# Altium PCB boardLedSeq.PcbDoc
Units mm, origin at the board's own origin, x right, y up, seen from the top; angles counter-clockwise.
Board outline 27 x 41 mm, 2 copper layers (Top Layer, Bottom Layer), stack 1.67 mm thick; 31 components, 26 nets, 83 pads, 33 vias.
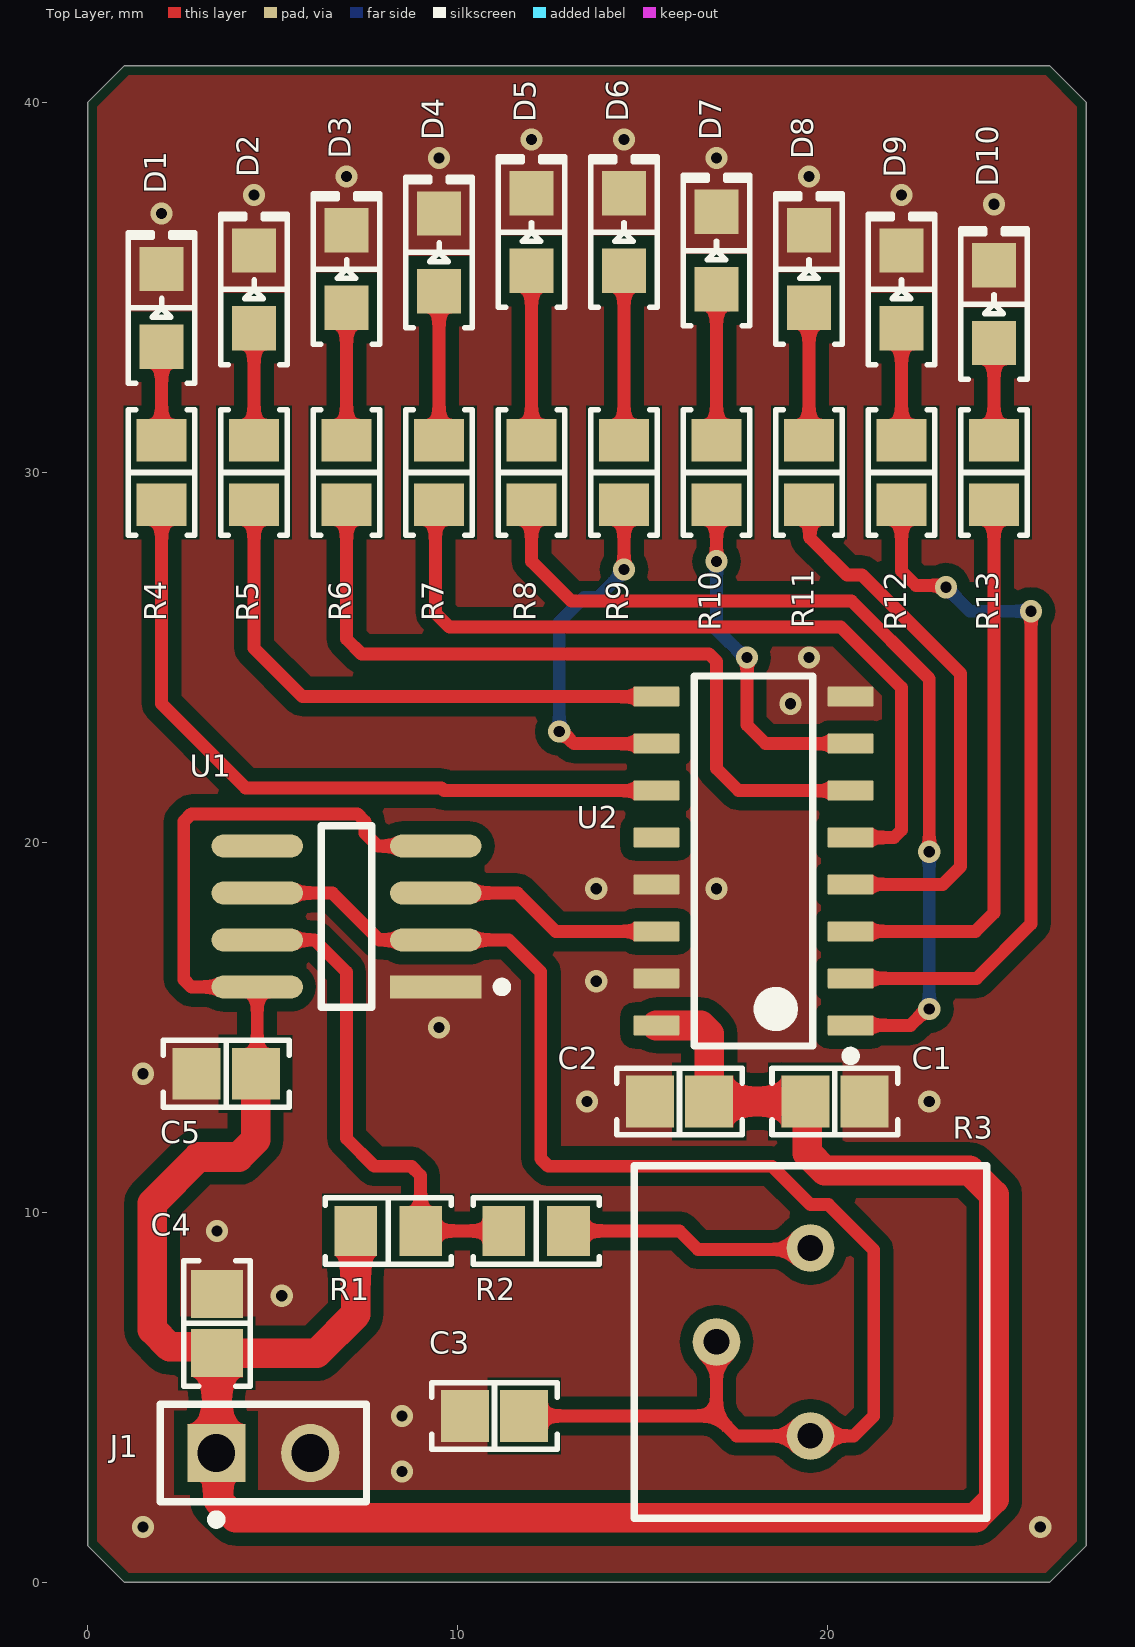
[diagram p0: Top Layer view]
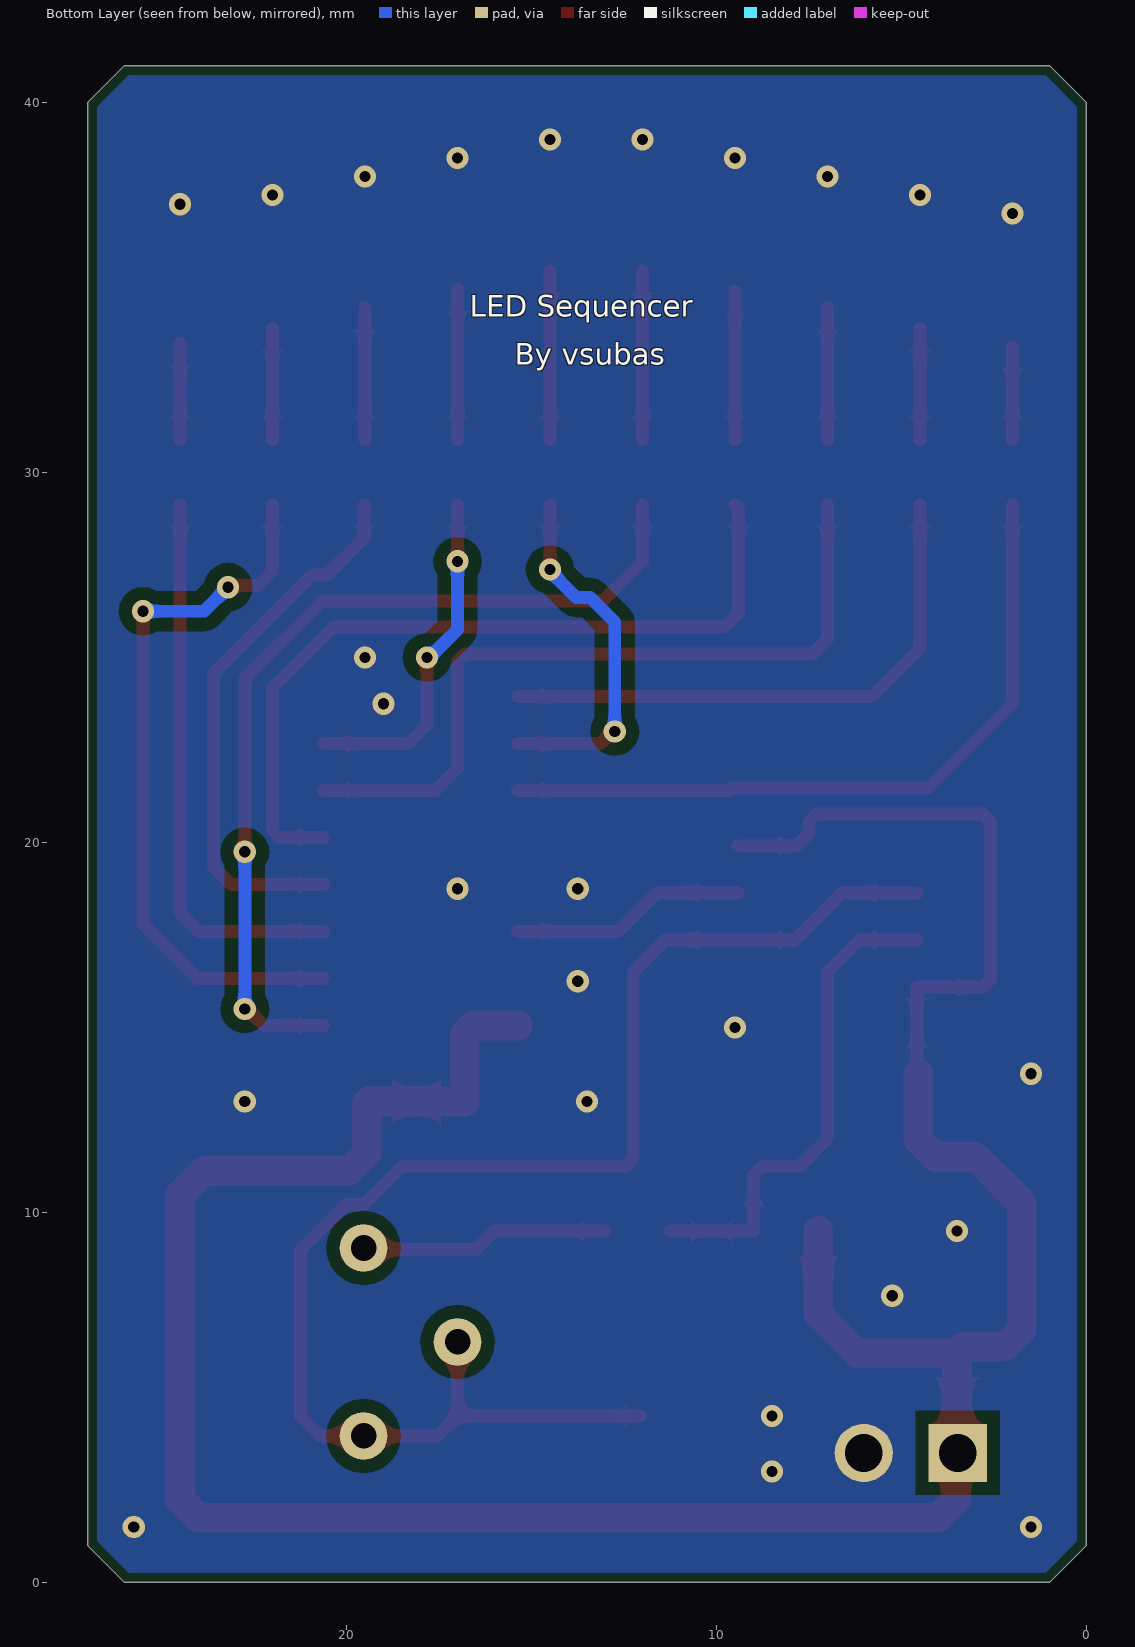
[diagram p1: Bottom Layer view, seen from below]
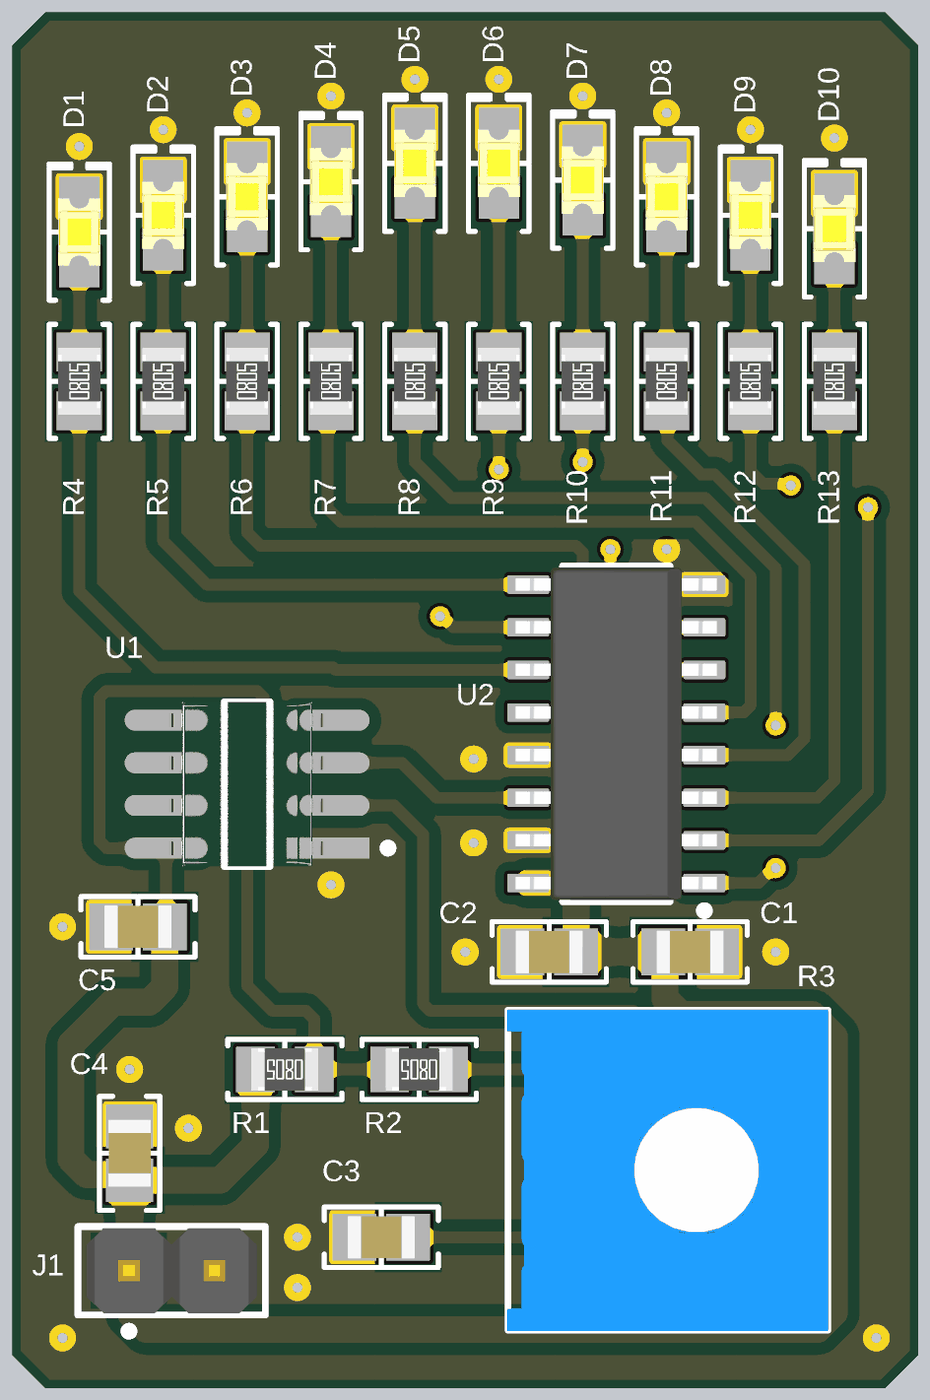
[diagram p2: 3D render of the assembled board from above, using the file's embedded part models]

## Layer stack, top to bottom
Top Solder: solder mask 0.0254, SM-001, Dk 4
Top Layer: signal copper 0.035
Dielectric 1: core 1.6, Core-043, Dk 4.3
Bottom Layer: signal copper 0.035
Bottom Solder: solder mask 0.0254, SM-001, Dk 4

## Board outline
1,0 0,1 0,40 1,41 26,41 27,40 27,1 26,0

## Design rules (kind name [scope] priority, off if disabled: settings)
BoardOutlineClearance [All] p1: gap=0.254 ignorepadtopadclearanceinfootprint=FALSE
Clearance [All] p1: gap=0.35 ignorepadtopadclearanceinfootprint=TRUE
MinimumSolderMaskSliver [All] p1: minsoldermaskwidth=0.05
PlaneClearance [All] p1: clearance=0.35
PlaneConnect [All] p1: pad.planeconnectstyle=Relief pad.reliefexpansion=0.508 pad.reliefentries=4 pad.reliefconductorwidth=0.5 pad.reliefairgap=0.254 via.planeconnectstyle=Direct via.reliefexpansion=0.508 via.reliefentries=4 via.reliefconductorwidth=0.254 via.reliefairgap=0.254
PolygonConnect [All] p1: connectstyle=Direct reliefconductorwidth=0.5 reliefentries=4 polygonreliefangle="45 Angle" airgapwidth=0.254
RoutingVias [All] p1: holewidth=0.3 width=0.6 viastyle="Through Hole" minholewidth=0.3 minwidth=0.6 maxholewidth=0.3 maxwidth=0.6
SilkToSilkClearance [All] p1: silktosilkclearance=0.05
SilkToSolderMaskClearance [IsPad] p1: minsilkscreentomaskgap=0.05 clearancetoexposedcopper=TRUE
SolderMaskExpansion [All] p1: expansion=0.102 istentingtop=FALSE
Width [All] p1: maxlimit=0.8 minlimit=0.254 preferedwidth=0.35
25 further rules are at their usual default settings.

## Components (designator, comment, footprint, x,y, rotation, side; value= is the part's Value field where it differs from the comment)
C1 "10 µF" "CAP 0805_2012" 20.2,13 r180 top
C2 "0.1 µF" "CAP 0805_2012" 16,13 r0 top
C3 "1µF" "CAP 0805_2012" 11,4.5 r0 top
C4 "10 µF" "CAP 0805_2012" 3.5,7 r270 top
C5 "0.1 µF" "CAP 0805_2012" 3.75,13.75 r0 top
D1 "Yellow" "LED 0805_2012 YELLOW" 2,34.45 r90 top
D2 "Yellow" "LED 0805_2012 YELLOW" 4.5,34.95 r90 top
D3 "Yellow" "LED 0805_2012 YELLOW" 7,35.5 r90 top
D4 "Yellow" "LED 0805_2012 YELLOW" 9.5,35.95 r90 top
D5 "Yellow" "LED 0805_2012 YELLOW" 12,36.5 r90 top
D6 "Yellow" "LED 0805_2012 YELLOW" 14.5,36.5 r90 top
D7 "Yellow" "LED 0805_2012 YELLOW" 17,36 r90 top
D8 "Yellow" "LED 0805_2012 YELLOW" 19.5,35.5 r90 top
D9 "Yellow" "LED 0805_2012 YELLOW" 22,34.95 r90 top
D10 "Yellow" "LED 0805_2012 YELLOW" 24.5,34.55 r90 top
J1 "M20-9990245" FP-M20-9990245-MFG 4.75,3.5 r0 top
R1 "2.2k" "RES 0805_2012" 8.125,9.5 r180 top
R2 "10k" "RES 0805_2012" 12.125,9.5 r180 top
R3 "50k" "BOURNS TRIMPOT 3386P-1" 19.54,6.5 r270 top
R4 "1k" "RES 0805_2012" 2,30 r90 top
R5 "1k" "RES 0805_2012" 4.5,30 r90 top
R6 "1k" "RES 0805_2012" 7,30 r90 top
R7 "1k" "RES 0805_2012" 9.5,30 r90 top
R8 "1k" "RES 0805_2012" 12,30 r90 top
R9 "1k" "RES 0805_2012" 14.5,30 r90 top
R10 "1k" "RES 0805_2012" 17,30 r90 top
R11 "1k" "RES 0805_2012" 19.5,30 r90 top
R12 "1k" "RES 0805_2012" 22,30 r90 top
R13 "1k" "RES 0805_2012" 24.5,30 r90 top
U1 "NE555DR" FP-D0008A-IPC_A 7,18 r180 top
U2 "CD4017BM96" D0016A_L 18,19.5 r180 top

## Footprints (in the part's own frame and the unit in brackets; to place one, negate y for a bottom-side part, rotate by r counter-clockwise, add the part's x,y. Pads: shape width x height; smd on the part's side, far side on the other; paste and mask are expansions set on the pad)
"BOURNS TRIMPOT 3386P-1" [mm] "3386 - 3/8 ? Square Trimpot® Trimming Potentiometer"
  round 1.29 hole 0.69: 1(-2.54,0) 2(0,-2.54) 3(2.54,0)
  silkscreen extent -4.76,-4.76 4.76,4.76, body extent -4.79,-4.79 4.79,4.79, height 4.95
"CAP 0805_2012" [mm] "Chip Capacitor, 2-Leads, Body 2.00x1.20mm, IPC Medium Density"
  rect 1.3x1.4 smd: 1(-0.8,0) 2(0.8,0)
  silkscreen extent -1.7,-0.9 1.7,0.9, body extent -1,-0.64 1,0.64, height 1.26
D0016A_L [mm] "SOIC, 16-Leads, Body 10x4mm, Pitch 1.27mm, IPC High Density"
  rrect18% 1.25x0.55 smd: 1(-2.625,4.445) 2(-2.625,3.175) 3(-2.625,1.905) 4(-2.625,0.635) 5(-2.625,-0.635) 6(-2.625,-1.905) 7(-2.625,-3.175) 8(-2.625,-4.445) 9(2.625,-4.445) 10(2.625,-3.175) 11(2.625,-1.905) 12(2.625,-0.635) 13(2.625,0.635) 14(2.625,1.905) 15(2.625,3.175) 16(2.625,4.445)
  silkscreen extent -2.75,-5 1.6,5.39, body extent -3,-4.95 3,4.95, height 1.59
FP-D0008A-IPC_A [mm]
  rect 2.469x0.622 smd paste+0 mask+0: 1(-2.414,1.905)
  rrect100% 2.469x0.622 smd paste+0 mask+0: 2(-2.414,0.635) 3(-2.414,-0.635) 4(-2.414,-1.905) 5(2.414,-1.905) 6(2.414,-0.635) 7(2.414,0.635) 8(2.414,1.905)
  silkscreen extent -4.32,-2.45 0.68,2.45, body extent -4.15,-2.95 4.15,2.95, height 0.25
FP-M20-9990245-MFG [mm]
  rect 1.57x1.57 hole 1.02 paste-1000 mask+0: 1(-1.27,0)
  round 1.57 hole 1.02 paste-1000 mask+0: 2(1.27,0)
  silkscreen extent -2.79,-1.92 2.79,1.32, body extent -2.89,-1.42 2.89,1.42, height 0.25
"LED 0805_2012 YELLOW" [mm] "Chip Diode, 2-Leads, Body 2.00x1.25mm, IPC Medium Density"
  rect 1.2x1.2 smd: 1(-1.05,0) 2(1.05,0)
  silkscreen extent -2.03,-0.9 2.03,0.9, body extent -1,-0.62 1,0.63, height 0.9
"RES 0805_2012" [mm] "Chip Resistor, 2-Leads, Body 2.00x1.25mm, IPC Medium Density"
  rect 1.15x1.35 smd: 1(-0.875,0) 2(0.875,0)
  silkscreen extent -1.7,-0.9 1.7,0.9, body extent -1,-0.62 1,0.63, height 0.6

## Part data
C1 C4: library part C2012X5R1E106K125AB, "CAP CER 10UF 25V X5R 0805", Device Package="0805 (2012 Metric)", manufacturer="TDK Corporation", Operating Temperature="-55°C ~ 85°C", Supplier Part Number 1=445-5984-1-ND, Temperature Coefficient=X5R, Tolerance=±10%, Voltage - Rated=25V, Applications="General Purpose", Capacitance="10 µF", componentlink1description=Datasheet, componentlink1url=https://product.tdk.com/info/en/catalog/datasheets/mlcc_commercial_general_en.pdf?ref_disty=digikey, componentlink2description="DigiKey Link", componentlink2url=https://www.digikey.com/en/products/detail/tdk-corporation/C2012X5R1E106K125AB/2443462, Features="Low ESL", lastupdated="29/04/2023 7:14:18 PM", Lifecycle Status=Active, Minimum Order=1, Mounting Type="Surface Mount, MLCC", Package / Case="0805 (2012 Metric)", packaging=TapeAndReel, Part Number=C2012X5R1E106K125AB, Part Status=Active, partid=4850, price=0.06, series=C, Size / Dimension="0.079\" L x 0.049\" W (2.00mm x 1.25mm)", Supplier 1=DigiKey, Thickness (Max)="0.057\" (1.45mm)"
C2 C5: library part CC0805MRX7R9BB104, "CAP CER 0.1UF 50V X7R 0805", Device Package="0805 (2012 Metric)", manufacturer=Yageo, Operating Temperature="-55°C ~ 125°C", Supplier Part Number 1=311-4351-1-ND, Temperature Coefficient=X7R, Tolerance=±20%, Voltage - Rated=50V, Applications="General Purpose", Capacitance="0.1 µF", componentlink1description=Datasheet, componentlink1url=https://www.yageo.com/upload/media/product/productsearch/datasheet/mlcc/UPY-GPHC_X7R_6.3V-to-50V_18.pdf, componentlink2description="DigiKey Link", componentlink2url=https://www.digikey.com/en/products/detail/yageo/CC0805MRX7R9BB104/5884281, lastupdated="29/04/2023 7:14:25 PM", Lifecycle Status=Active, Minimum Order=1, Mounting Type="Surface Mount, MLCC", Package / Case="0805 (2012 Metric)", packaging=TapeAndReel, Part Number=CC0805MRX7R9BB104, Part Status=Active, partid=2475, price=0.01, series=CC, Size / Dimension="0.079\" L x 0.049\" W (2.00mm x 1.25mm)", Supplier 1=DigiKey, Thickness (Max)="0.037\" (0.95mm)"
C3: library part MM05ZC105KCZ2A, "CAP CER 1UF 10V X7R 0805", Device Package="0805 (2012 Metric)", manufacturer="AVX Corporation", Operating Temperature="-55°C ~ 125°C", Supplier Part Number 1=478-10611-1-ND, Temperature Coefficient=X7R, Tolerance=±10%, Voltage - Rated=10V, Applications="Medical, Non-Critical", Capacitance=1µF, componentlink1description=Datasheet, componentlink1url=http://datasheets.avx.com/AVX-MM.pdf, componentlink2description="DigiKey Link", componentlink2url=http://digikey.com/product-detail/en/avx-corporation/MM05ZC105KCZ2A/478-10611-1-ND/7344872, lastupdated="2/09/2020 1:04:42 AM", Lifecycle Status=Active, Minimum Order=1, Mounting Type="Surface Mount, MLCC", Package / Case="0805 (2012 Metric)", packaging=TapeAndReel, Part Number=MM05ZC105KCZ2A, Part Status=Active, partid=2439, price=0.50, series=MM, Size / Dimension="0.079\" L x 0.049\" W (2.01mm x 1.25mm)", Supplier 1=DigiKey, Thickness (Max)="0.029\" (0.74mm)"
D1 D2 D3 D4 D5 D6 D7 D8 D9 D10: library part 5988140107F, "LED YELLOW CLEAR 0805 SMD", Current - Test=20mA, Device Package="0805 (2012 Metric)", Lens Color=Colorless, manufacturer=Dialight, Millicandela Rating=130mcd, Supplier Device Package=0805, Supplier Part Number 1=350-2041-1-ND, Voltage - Forward (Vf) (Typ)=2V, Color=Yellow, componentlink1description=Datasheet, componentlink1url=//media.digikey.com/pdf/Data%20Sheets/Dialight%20PDFs/598_Series_0805_Pkg.pdf, componentlink2description="DigiKey Link", componentlink2url=https://www.digikey.com/en/products/detail/dialight/5988140107F/1291275, Configuration=Standard, Height (Max)=0.80mm, lastupdated="29/04/2023 8:08:57 PM", Lens Size="1.40mm x 1.25mm", Lens Style="Rectangle with Flat Top", Lens Transparency=Clear, Lifecycle Status=Active, Minimum Order=1, Mounting Type="Surface Mount", Package / Case="0805 (2012 Metric)", packaging=TapeAndReel, Part Number=5988140107F, Part Status=Active, partid=48, price=0.05, series=598, Size / Dimension="2.00mm L x 1.25mm W", Supplier 1=DigiKey, Viewing Angle=140°, Wavelength - Dominant=593nm
J1: library part CMP-15831-000105-1, "CONN HEADER VERT 2POS 2.54MM", Case/Package=SIL, Color=Black, Contact Resistance=25mR, Current=3A, Flammability Rating="UL94 V-0", Insulation Resistance=10GR, Max Operating Temperature=105°C, Min Operating Temperature=-40°C, Package Quantity=1000, Voltage=50V, Voltage Rating (AC)=750V, Connector Type="Male Pin", Contact Finish - Mating=GOLD, Contact Material=Brass, Contact Mating Length=0.24inch, Contact Plating=Gold, Contact Shape=Square, Contact Type="Male Pin", Current Rating=3A, Depth=2.54mm, Fastening Type=Pull, Gender=Male, Height=0.12inch, Housing Color=Black, Housing Material=Nylon, Insulation Color=Black, Insulation Material=Nylon, Lead Pitch=2.54mm, Length=5.08mm, Mated Stacking Heights=16.54mm, Mating Cycles=300, Max Current Rating=3A, Mount="Through Hole", Number of Contacts=2, Number of Poles=2, Number of Positions=2, Number of Rows=1, Orientation=Straight, packaging=Bulk, Pitch=2.54mm, Radiation Hardening=No, Reach SVHC Compliant=Yes, series=M20, Termination=Solder, Weight=0.25lb, Width=0.25inch, Working Voltage=750V
R1: library part SR0805JR-7W2K2L, "RES 2.2K OHM 5% 1/4W 0805", Device Package="0805 (2012 Metric)", manufacturer=Yageo, Operating Temperature="-55°C ~ 155°C", Power (Watts)="0.25W, 1/4W", Ratings=AEC-Q200, Supplier Device Package=0805, Supplier Part Number 1=YAG6054CT-ND, Temperature Coefficient=±100ppm/°C, Tolerance=±5%, componentlink1description=Datasheet, componentlink1url=http://www.yageo.com/documents/recent/PYu-SR_20105_RoHS_L_8.pdf, componentlink2description="DigiKey Link", componentlink2url=https://www.digikey.com/en/products/detail/yageo/SR0805JR-7W2K2L/5948720, Composition="Thick Film", Features="Automotive AEC-Q200, Pulse Withstanding", Height - Seated (Max)="0.024\" (0.60mm)", lastupdated="29/04/2023 7:52:18 PM", Lifecycle Status=Active, Minimum Order=1, Number of Terminations=2, Package / Case="0805 (2012 Metric)", packaging=TapeAndReel, Part Number=SR0805JR-7W2K2L, Part Status=Active, partid=27793, price=0.02, Resistance=2.2k, series=SR, Size / Dimension="0.079\" L x 0.049\" W (2.00mm x 1.25mm)", Supplier 1=DigiKey
R2: library part RNCS0805BKE10K0, "RES 10K OHM 0.1% 1/10W 0805", Device Package="0805 (2012 Metric)", manufacturer="Stackpole Electronics Inc", Operating Temperature="-55°C ~ 155°C", Power (Watts)="0.1W, 1/10W", Ratings=AEC-Q200, Supplier Device Package=0805, Supplier Part Number 1=RNCS0805BKE10K0CT-ND, Temperature Coefficient=±25ppm/°C, Tolerance=±0.1%, componentlink1description=Datasheet, componentlink1url=https://www.seielect.com/catalog/sei-rncs_rnch.pdf, componentlink2description="DigiKey Link", componentlink2url=https://www.digikey.com/en/products/detail/stackpole-electronics-inc/RNCS0805BKE10K0/1800067, Composition="Thin Film", Features="Anti-Corrosive, Automotive AEC-Q200, Moisture Resistant", Height - Seated (Max)="0.026\" (0.65mm)", lastupdated="29/04/2023 7:52:18 PM", Lifecycle Status=Active, Minimum Order=1, Number of Terminations=2, Package / Case="0805 (2012 Metric)", packaging=TapeAndReel, Part Number=RNCS0805BKE10K0, Part Status=Active, partid=27713, price=0.07, Resistance=10k, series=RNCS, Size / Dimension="0.079\" L x 0.049\" W (2.00mm x 1.25mm)", Supplier 1=DigiKey
R3: library part 3386P-1-503, "TRIMMER 50K OHM 0.5W PC PIN TOP", manufacturer="Bourns Inc.", Power (Watts)="0.5W, 1/2W", Resistive Material=Cermet, Supplier Part Number 1=3386P-503-ND, Temperature Coefficient=±100ppm/°C, Tolerance=±10%, Adjustment Type="Top Adjustment", componentlink1description=Datasheet, componentlink1url=https://www.bourns.com/docs/Product-Datasheets/3386.pdf, componentlink2description="DigiKey Link", componentlink2url=https://www.digikey.com/en/products/detail/bourns-inc/3386P-1-503/86812, lastupdated="29/04/2023 8:27:50 PM", Lifecycle Status=Active, Minimum Order=1, Mounting Type="Through Hole", Number of Turns=1, packaging=Tube, Part Number=3386P-1-503, Part Status=Active, partid=123, price=1.18, Resistance=50k, series="Trimpot® 3386 - Sealed", Size / Dimension="Square - 0.375\" x 0.375\" Face (9.53mm x 9.53mm)", Supplier 1=DigiKey, Termination Style="PC Pins"
R4 R5 R6 R7 R8 R9 R10 R11 R12 R13: library part RNCS0805BKE1K00, "RES 1K OHM 0.1% 1/10W 0805", Device Package="0805 (2012 Metric)", manufacturer="Stackpole Electronics Inc", Operating Temperature="-55°C ~ 155°C", Power (Watts)="0.1W, 1/10W", Ratings=AEC-Q200, Supplier Device Package=0805, Supplier Part Number 1=RNCS0805BKE1K00CT-ND, Temperature Coefficient=±25ppm/°C, Tolerance=±0.1%, componentlink1description=Datasheet, componentlink1url=https://www.seielect.com/catalog/sei-rncs_rnch.pdf, componentlink2description="DigiKey Link", componentlink2url=https://www.digikey.com/en/products/detail/stackpole-electronics-inc/RNCS0805BKE1K00/1800073, Composition="Thin Film", Features="Anti-Corrosive, Automotive AEC-Q200, Moisture Resistant", Height - Seated (Max)="0.026\" (0.65mm)", lastupdated="29/04/2023 7:52:18 PM", Lifecycle Status=Active, Minimum Order=1, Number of Terminations=2, Package / Case="0805 (2012 Metric)", packaging=TapeAndReel, Part Number=RNCS0805BKE1K00, Part Status=Active, partid=27715, price=0.07, Resistance=1k, series=RNCS, Size / Dimension="0.079\" L x 0.049\" W (2.00mm x 1.25mm)", Supplier 1=DigiKey
U1: library part CMP-1685-00007-2, "IC OSC SGL TIMER 100KHZ 8-SOIC", Case/Package=SOIC, Frequency=100kHz, High Level Output Current=-200mA, Low Level Output Current=200mA, Max Operating Temperature=70°C, Max Supply Voltage=16V, Min Operating Temperature=0°C, Min Supply Voltage=4.5V, Operating Supply Current=10mA, Package Quantity=2500, Quiescent Current=15mA, Contact Plating=Gold, Height=1.58mm, Lead Free="Lead Free", Length=4.9mm, Mount="Surface Mount", Number of Pins=8, Number of Timers/Counters=1, packaging="Tape and Reel", Radiation Hardening=No, REACH SVHC="No SVHC", Weight=0.002561oz, Width=3.91mm
U2: library part CMP-1623-00072-2, "CMOS Decade Counter with 10 Decoded Outputs, D0016A, LARGE T&R", F @ Nom Voltage(Max)(Mhz)=8, Generic Part Number=CD4017B, ICC @ Nom Voltage(Max)(mA)=0.03, manufacturer="Texas Instruments", Operating Temperature Range(C)="-55 to 125", Rating=Military, tpd @ Nom Voltage(Max)(ns)=270, Voltage(Nom)(V)=10, Bits(#)=10, Code_JEDEC="MS-012 variation AC", DatasheetVersion=SCHS027C, Function=Counter, Input Type=CMOS, Inputs=1, Output Drive (IOL/IOH)(Max)(mA)=1.5/-1.5, Output Type=CMOS, PackageReference=D0016A, Schmitt Trigger=No, Technology Family=CD4000, Type=Decade, VCC(Max)(V)=18, VCC(Min)(V)=3

## Via types
v1: diameter 0.6, hole 0.3, Top Layer to Bottom Layer, 33 vias

## Nets (pads, with @x,y where several pads share a name; then routed paths per layer and width w, separated by ;. In a path a pad name is that pad's centre, name@x,y a point inside that pad or via, vN(x,y) a via of type N, cw(c..) or ccw(c..) an arc to the next point about the centre after c; other vN are vias at no path point)
+5V: C1.2 C2.2 C4.2 C5.2 J1.1 R1.2 U1.4 U1.8 U2.16 | length 79.8
  Top Layer w0.35: C5.2 4.586,13.786 U1.8 2.805,16.095 2.6,16.3 2.6,20.57 2.805,20.775 7.295,20.775 7.5,20.57 7.5,20.25 7.845,19.905 U1.4
  Top Layer w0.8: C5.2 4.55,11.969 4.081,11.5 3,11.5 1.75,10.25 1.75,6.834 2.219,6.366 3.334,6.366 C4.2 ; R1.2 7.25,7.25 6.2,6.2 C4.2 ; U2.16 16.577,15.055 16.8,14.832 C2.2 C1.2 19.453,12.947 19.453,11.606 19.923,11.135 23.839,11.135 24.5,10.474 24.5,2.25 24,1.75 4,1.75 3.531,2.219 3.531,2.969 3.5,3 C4.2
CLK: U1.3 U2.14 | length 6.4
  Top Layer w0.35: U1.3 11.615,18.635 12.655,17.595 U2.14
DISCH: R1.1 R2.2 U1.7 | length 13.4
  Top Layer w0.35: U1.7 6.135,17.365 7,16.5 7,12 7.75,11.25 8.75,11.25 9,11 R1.1 R2.2
GND: C1.1 C2.1 C3.1 C4.1 C5.1 D1.2 D2.2 D3.2 D4.2 D5.2 D6.2 D7.2 D8.2 D9.2 D10.2 J1.2 U1.1 U2.8 U2.13 U2.15
  other v1: 1.5,1.5 25.75,1.5 8.5,3 8.5,4.5 5.25,7.75 3.5,9.5 13.5,13 22.75,13 1.5,13.75 9.5,15 13.75,16.25 13.75,18.75 17,18.75 19,23.75 19.5,25 2,37 24.5,37.25 4.5,37.5 22,37.5 7,38 19.5,38 9.5,38.5 17,38.5 12,39 14.5,39
OUTD0: R13.1 U2.3 | length 15.1
  Top Layer w0.35: U2.3 23.995,17.595 24.5,18.1 R13.1
OUTD1: R12.1 U2.2 | length 19.7
  Top Layer w0.35: U2.2 24.025,16.325 25.5,17.8 v1(25.5,26.25) ; R12.1 22,27.339 22.391,26.948 23.152,26.948 v1(23.2,26.9)
  Bottom Layer w0.35: v1(23.2,26.9) 23.85,26.25 v1(25.5,26.25)
OUTD2: R11.1 U2.4 | length 14.9
  Top Layer w0.35: R11.1 19.526,29.099 19.526,28.23 20.531,27.225 20.938,27.225 23.6,24.563 23.6,19.35 23.115,18.865 U2.4
OUTD3: R10.1 U2.7 | length 9.3
  Top Layer w0.35: v1(17,27.6) R10.1 ; v1(17.825,25) 17.825,23.175 18.325,22.675 U2.7
  Bottom Layer w0.35: v1(17,27.6) 17,25.75 17.328,25.422 17.335,25.422 17.757,25 v1(17.825,25)
OUTD4: R9.1 U2.10 | length 9.8
  Top Layer w0.35: v1(12.75,23) 12.818,23 13.143,22.675 U2.10 ; v1(14.5,27.375) R9.1
  Bottom Layer w0.35: v1(12.75,23) 12.75,25.958 13.414,26.622 13.789,26.622 14.5,27.333 v1(14.5,27.375)
OUTD5: R8.1 U2.1 | length 24.8
  Top Layer w0.35: R8.1 12,27.6 13.075,26.525 20.648,26.525 22.75,24.423 v1(22.75,19.75) ; U2.1 22.237,15.055 22.682,15.5 v1(22.75,15.5)
  Bottom Layer w0.35: v1(22.75,15.5) v1(22.75,19.75)
OUTD6: R7.1 U2.5 | length 21.7
  Top Layer w0.35: R7.1 9.4,29.025 9.4,26.205 9.78,25.825 20.358,25.825 22,24.183 22,20.34 21.795,20.135 U2.5
OUTD7: R6.1 U2.6 | length 20.6
  Top Layer w0.35: R6.1 7,25.5 7.4,25.1 16.795,25.1 17,24.895 17,22 17.595,21.405 U2.6
OUTD8: R5.1 U2.9 | length 15.3
  Top Layer w0.35: R5.1 4.5,25.25 5.805,23.945 U2.9
OUTD9: R4.1 U2.11 | length 19.7
  Top Layer w0.35: R4.1 2,23.75 4.275,21.475 9.565,21.475 9.635,21.405 U2.11
R2R3: R2.1 R3.1 | length 6.8
  Top Layer w0.35: R2.1 16,9.5 16.5,9 19.5,9 R3.1
RD1: D1.1 R4.2 | length 2.5
  Top Layer w0.35: R4.2 D1.1
RD2: D2.1 R5.2 | length 3
  Top Layer w0.35: R5.2 D2.1
RD3: D3.1 R6.2 | length 3.6
  Top Layer w0.35: R6.2 D3.1
RD4: D4.1 R7.2 | length 4
  Top Layer w0.35: R7.2 D4.1
RD5: D5.1 R8.2 | length 4.6
  Top Layer w0.35: R8.2 D5.1
RD6: D6.1 R9.2 | length 4.6
  Top Layer w0.35: R9.2 D6.1
RD7: D7.1 R10.2 | length 4.1
  Top Layer w0.35: R10.2 D7.1
RD8: D8.1 R11.2 | length 3.6
  Top Layer w0.35: R11.2 D8.1
RD9: D9.1 R12.2 | length 3
  Top Layer w0.35: R12.2 D9.1
RD10: D10.1 R13.2 | length 2.6
  Top Layer w0.35: R13.2 D10.1
TRIG: C3.2 R3.2 R3.3 U1.2 U1.6 | length 39.7
  Top Layer w0.35: U1.6 6.615,18.635 7.885,17.365 U1.2 11.385,17.365 12.25,16.5 12.25,11.455 12.455,11.25 18.5,11.25 19.54,10.21 20.025,10.21 21.25,8.985 21.25,4.5 20.71,3.96 R3.3 17.54,3.96 17,4.5 ; C3.2@12.05,4.5 17,4.5 ; R3.2 17,4.5
pads on no net: U1.5 U2.12

## Polygon pours and split planes (outlines as drawn)
GND on Bottom Layer "BOT GND" (solid, pour order 0): 1,0 0,1 0,40 1,41 26,41 27,40 27,1 26,0
GND on Top Layer "TOP GND" (solid, remove dead copper, pour order 1): 1,0 0,1 0,40 1,41 26,41 27,40 27,1 26,0

## Silkscreen, mask and mechanical layers (free items; w line width, h text height)
Bottom Overlay:
  text "LED Sequencer" at 16.675,34.003 h1
  text "By vsubas" at 15.45,32.714 h1
boardoutline:
  lines w0.254: 0,40 1,41 26,41 27,40 27,1 26,0 1,0 0,1 0,40 ; 0,40 0,40